# EAGLE board midicontrol_v5 (EAGLE 9.4.0)
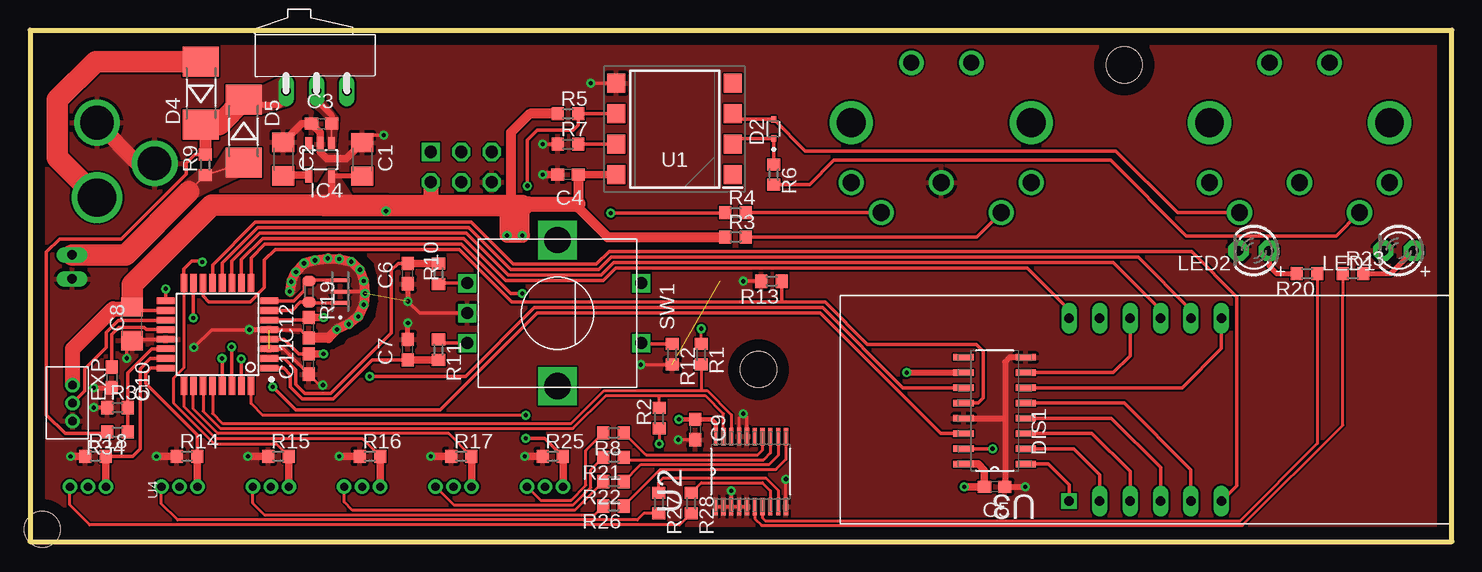
[diagram p0: board, top side]
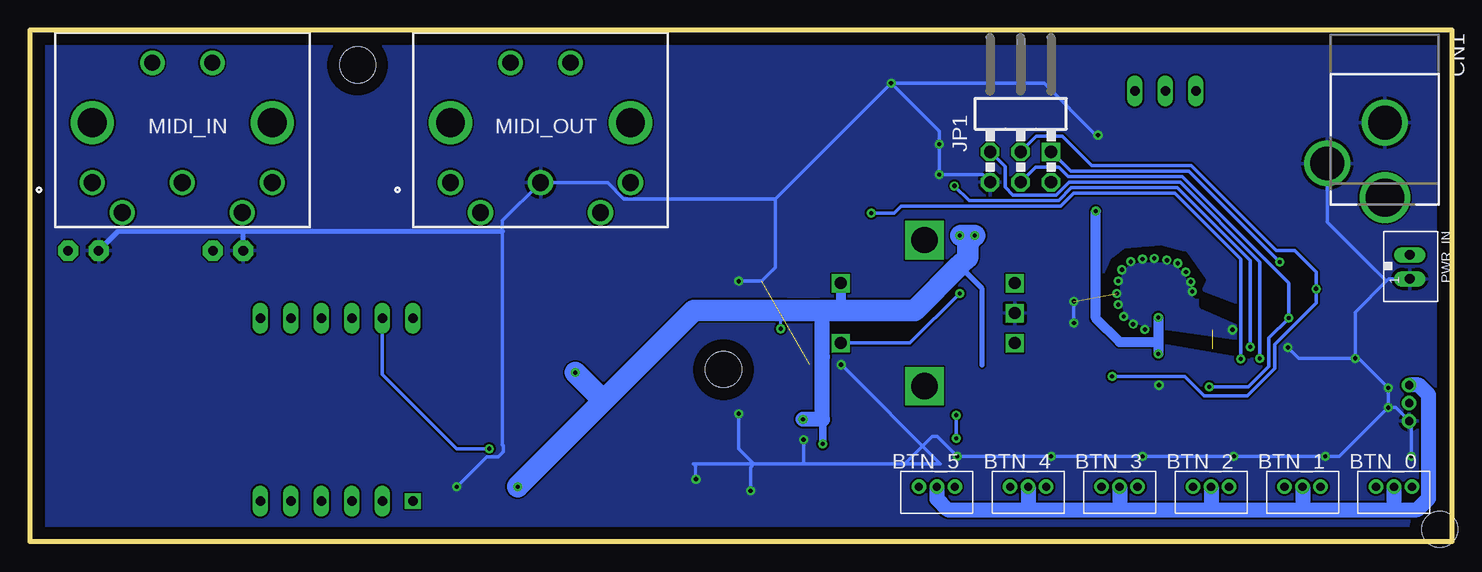
[diagram p1: board, bottom side, seen from below]

Size 118.49 x 42.67 mm. Coordinates in mm from the lower left corner, seen from the top.
Outline: 0,42.67 0,0 118.49,0 118.49,42.67 0,42.67
Copper layers (1*16): Top 0.035mm / dielectric 1.5mm / Bottom 0.035mm
Design rules "default": minimum track width 6mil, minimum drill 0.35mm, track to track 6mil, track to pad 6mil, pad to pad 6mil, via to via 6mil, smd to smd 6mil, copper to edge 40mil, drill to drill 6mil, minimum pad ring 10mil, minimum via ring 8mil, stop-mask expansion 4mil, vias tented up to drill 0mil, thermal gap 10mil
Net classes: 0 default: clearance 0.152 mm
Holes 3 mm at 91.19,39.75 60.71,14.35 1.02,1.02

## Footprints (pad centres in the part's own frame; a part is rotated, then mirrored left to right if it is on the bottom)
B3B-ZR = drill 0.7 pad 1.1: 1 -1.5,0; 2 0,0; 3 1.5,0
C1206 = smd 1.6 x 1.8: 1 -1.4,0; 2 1.4,0
C0603 = smd 1.1 x 1: 1 -0.85,0; 2 0.85,0
DCJACK_2MM_PTH = drill 2.8: GND 0,7.35; GNDBREAK 4.8,10.75 | drill 3.2: PWR 0,13.6
SODFL1608X70N = smd 0.53 x 0.4: A 0.8,0; C -0.8,0
MELF-MLL41 = smd 2.5 x 3: A 2.625,0; C -2.625,0
NFD-5641 = drill 0.8 square: P$1 -6.35,-7.62 | drill 0.8 long: P$2 -3.81,-7.62; P$3 -1.27,-7.62; P$4 1.27,-7.62; P$5 3.81,-7.62; P$6 6.35,-7.62; P$7 6.35,7.62; P$8 3.81,7.62; P$9 1.27,7.62; P$10 -1.27,7.62; P$11 -3.81,7.62; P$12 -6.35,7.62
SOT23-5 = smd 0.55 x 1.2: 1 -0.95,-1.3; 2 0,-1.3; 3 0.95,-1.3; 4 0.95,1.3; 5 -0.95,1.3
AVR-ISP-6R = drill 1.016 square: 1 -2.54,-1.27 | drill 1.016 octagon: 2 -2.54,1.27; 3 0,-1.27; 4 0,1.27; 5 2.54,-1.27; 6 2.54,1.27
LED3MM = drill 0.813 pad 1.676 octagon: A -1.27,0; K 1.27,0
MAB-5-SH = drill 1.4 pad 2.1: 1 7.5,-2.5; 2 0,-2.5; 3 -7.5,-2.5; 4 5,0; 5 -5,0 | drill 1.35 pad 2: 6 -2.5,-12.5; 7 2.5,-12.5 | drill 2.4 pad 3.6: 8 -7.5,-7.5; 9 7.5,-7.5
JST_B2B-PH_HEADER = drill 0.8 long: P1 1.075,0.048; P2 -0.925,0.048
R0603 = smd 1 x 1.1: 1 -0.85,0; 2 0.85,0
R0603-ROUND = smd 0.898 x 1.1: 1 -0.889,0; 2 0.889,0
ESP201 = drill 0.8 long: P$1 0,0; P$2 2.54,0; P$3 -2.54,0
ALPS_EC12E_SW = drill 1 square: A -2.5,-7.5; B 2.5,-7.5; C 0,-7.5; D -2.5,7; E 2.5,7 | drill 2.2 square: GND1 -6.1,0; GND2 6.1,0
SOP254P1030X460-8N = smd 1.5 x 1.6: 1 -4.85,3.81; 2 -4.85,1.27; 3 -4.85,-1.27; 4 -4.85,-3.81; 5 4.85,-3.81; 6 4.85,-1.27; 7 4.85,1.27; 8 4.85,3.81
SOP65P640X110-20N = smd 1.473 x 0.356: 1 -2.921,2.921; 2 -2.921,2.286; 3 -2.921,1.626; 4 -2.921,0.965; 5 -2.921,0.33; 6 -2.921,-0.33; 7 -2.921,-0.965; 8 -2.921,-1.626; 9 -2.921,-2.286; 10 -2.921,-2.921; 11 2.921,-2.921; 12 2.921,-2.286; 13 2.921,-1.626; 14 2.921,-0.965; 15 2.921,-0.33; 16 2.921,0.33; 17 2.921,0.965; 18 2.921,1.626; 19 2.921,2.286; 20 2.921,2.921
SOIC127P600X175-16N = smd 1.702 x 0.533: 1 -2.591,4.445; 2 -2.591,3.175; 3 -2.591,1.905; 4 -2.591,0.635; 5 -2.591,-0.635; 6 -2.591,-1.905; 7 -2.591,-3.175; 8 -2.591,-4.445; 9 2.591,-4.445; 10 2.591,-3.175; 11 2.591,-1.905; 12 2.591,-0.635; 13 2.591,0.635; 14 2.591,1.905; 15 2.591,3.175; 16 2.591,4.445
QFP80P900X900X120-32N = smd 1.5 x 0.55: 1 -4.3,2.8; 2 -4.3,2; 3 -4.3,1.2; 4 -4.3,0.4; 5 -4.3,-0.4; 6 -4.3,-1.2; 7 -4.3,-2; 8 -4.3,-2.8; 17 4.3,-2.8; 18 4.3,-2; 19 4.3,-1.2; 20 4.3,-0.4; 21 4.3,0.4; 22 4.3,1.2; 23 4.3,2; 24 4.3,2.8 | smd 0.55 x 1.5: 9 -2.8,-4.3; 10 -2,-4.3; 11 -1.2,-4.3; 12 -0.4,-4.3; 13 0.4,-4.3; 14 1.2,-4.3; 15 2,-4.3; 16 2.8,-4.3; 25 2.8,4.3; 26 2,4.3; 27 1.2,4.3; 28 0.4,4.3; 29 -0.4,4.3; 30 -1.2,4.3; 31 -2,4.3; 32 -2.8,4.3
OSC_CSTCE16M0V53-R0 = smd 0.3 x 1.6: 1 -0.95,0; 2 0,0; 3 0.95,0

## Placement (x,y rotation side)
BTN_0  B3B-ZR  [B3B-ZR]  4.83,4.57 0 bottom
BTN_1  B3B-ZR  [B3B-ZR]  12.45,4.57 0 bottom
BTN_2  B3B-ZR  [B3B-ZR]  20.07,4.57 0 bottom
BTN_3  B3B-ZR  [B3B-ZR]  27.69,4.57 0 bottom
BTN_4  B3B-ZR  [B3B-ZR]  35.31,4.57 0 bottom
BTN_5  B3B-ZR  [B3B-ZR]  42.93,4.57 0 bottom
C1  4.7uf  [C1206]  27.69,31.88 270 top
C2  4.7uf  [C1206]  21.11,31.9 270 top
C3  0.1uf  [C0603]  24.31,34.85 0 top
C4  0.1uf  [C0603]  44.83,30.61 180 top
C5  4.7uf  [C0603]  80.39,4.57 180 top
C6  100nf  [C0603]  31.5,22.35 90 top
C7  100nf  [C0603]  31.5,16 90 top
C8  100nf  [C1206]  8.51,18.16 90 top
C9  0.1uf  [C0603]  55.42,9.35 270 top
C10  100nf  [C0603]  6.81,13.69 270 top
C11  100nf  [C0603]  23.24,14.81 90 top
C12  100nf  [C0603]  23.24,17.83 90 top
CN1  [DCJACK_2MM_PTH]  5.59,42.29 180 bottom
D2  1N914BWT  [SODFL1608X70N]  61.98,34.42 90 top
D4  1N4004/SM4004  [MELF-MLL41]  14.25,37.41 90 top
D5  1N4004/SM4004  [MELF-MLL41]  17.81,34.21 270 top
DIS1  NFD-5641BS  [NFD-5641]  92.94,11 0 top
EXP  B3B-ZR  [B3B-ZR]  3.56,11.56 270 top
IC4  [SOT23-5]  24.18,31.85 180 top
JP1  AVR-ISP-6HORZ  [AVR-ISP-6R]  35.94,31.24 180 bottom
LED1  [LED3MM]  114.05,24.26 180 top
LED2  [LED3MM]  101.98,24.26 180 top
MIDI_IN  MABP 5S  [MAB-5-SH]  105.79,27.43 180 bottom
MIDI_OUT  MAB_5_SH  [MAB-5-SH]  75.95,27.43 180 bottom
PWR_IN  JST-PH_2-PIN_HEADER  [JST_B2B-PH_HEADER]  3.56,22.99 270 bottom
R1  10k  [R0603]  55.93,15.62 270 top
R2  10k  [R0603]  52.43,10.29 90 top
R3  220R  [R0603]  58.8,25.4 0 top
R4  220R  [R0603]  58.8,27.43 0 top
R5  220  [R0603]  44.83,35.69 0 top
R6  220  [R0603]  61.98,30.61 270 top
R7  4.7k  [R0603]  44.83,33.15 0 top
R8  220R  [R0603]  48.64,9.07 180 top
R9  1k  [R0603]  14.61,31.42 90 top
R10  10k  [R0603]  34.04,22.35 90 top
R11  10k  [R0603]  34.04,16 270 top
R12  10k  [R0603]  53.52,15.62 270 top
R13  10k  [R0603]  61.8,21.72 180 top
R14  10k  [R0603]  13.08,7.11 0 top
R15  10k  [R0603]  20.7,7.11 0 top
R16  10k  [R0603]  28.32,7.11 0 top
R17  10k  [R0603]  35.94,7.11 0 top
R18  10k  [R0603]  5.46,7.11 0 top
R19  1M  [R0603-ROUND]  23.24,20.85 270 top
R20  220R  [R0603]  106.43,22.35 180 top
R21  220R  [R0603]  48.64,7.04 180 top
R22  220R  [R0603]  48.64,5 180 top
R23  220R  [R0603]  110.24,22.35 0 top
R25  10k  [R0603]  43.56,7.11 0 top
R26  220R  [R0603]  48.64,2.97 180 top
R27  220R  [R0603]  52.4,3.2 270 top
R28  220R  [R0603]  55.09,3.2 270 top
R34  100k  [R0603]  7.29,9.14 180 top
R35  69k  [R0603]  7.29,11.18 0 top
S1  ESP201  [ESP201]  23.88,37.59 0 top
SW1  EC12E_SW  [ALPS_EC12E_SW]  43.94,19.05 270 top
U1  6N138S(TB)  [SOP254P1030X460-8N]  53.72,34.42 180 top
U2  PCA9634PW,112  [SOP65P640X110-20N]  60.07,5.84 90 top
U3  74HC595D  [SOIC127P600X175-16N]  80.39,10.92 180 top
U4  ATMEGA328P-AN  [QFP80P900X900X120-32N]  15.62,17.27 180 top
Y1  CSTCE16M0V53-R0  [OSC_CSTCE16M0V53-R0]  25.86,20.85 90 top

## Library data of the parts
BTN_0 BTN_1-BTN_5 EXP = jst
C1-C12 = rcl; SPICEPREFIX: C
CN1 LED1 LED2 = adafruit
D2 = 1N914BWT; AVAILABILITY: Unavailable; DESCRIPTION: 1N914B Series 75 V 300 mA Surface Mount Small Signal Diode - SOD-523F; MF: ON Semiconductor; MP: 1N914BWT; PACKAGE: SOD-523F ON Semiconductor; PRICE: None
D4 D5 = _mod_diode
DIS1 = display-misc
IC4 = v-reg-micrel; OC_FARNELL: unknown; OC_NEWARK: unknown
JP1 = avr-7
MIDI_IN MIDI_OUT = MAB_5_SH; DESCRIPTION: HIRSCHMANN - MAB 5 SH - SOCKET, DIN, PCB, 5PIN; HEIGHT: mm; MANUFACTURER_NAME: Hirschmann; MANUFACTURER_PART_NUMBER: MAB 5 SH
PWR_IN = srg
R1-R18 R20-R23 R25-R28 R34 R35 = rcl; SPICEPREFIX: R
R19 = SmartPrj
S1 = olli
SW1 = switch-alps; MPN: EC12E2424407; OC_FARNELL: 1520813; OC_NEWARK: 74M1068
U1 = 6N138S(TB); DESCRIPTION: High Speed Optocouplers Low Input, High Gain DC Input; HEIGHT: 4.6mm; MANUFACTURER_NAME: Everlight; MANUFACTURER_PART_NUMBER: 6N138S(TB); MOUSER_PART_NUMBER: 638-6N138STB; MOUSER_PRICE-STOCK: https://www.mouser.com/Search/Refine.aspx?Keyword=638-6N138STB
U2 = PCA9634PW_112; AVAILABILITY: Unavailable; DESCRIPTION: LED DRVR 16Segment 2.5V/3.3V/5V 20-Pin TSSOP Tube; MF: NXP USA; MP: PCA9634PW,112; PACKAGE: TSSOP-20 NXP Semiconductors; PRICE: None
U3 = 74HC595D; AVAILABILITY: Unavailable; DESCRIPTION: Shift Register Single 8-Bit Serial to Serial/Parallel 16-Pin SO; MF: Toshiba Semiconductor; MP: 74HC595D; PACKAGE: SO-16 NXP Semiconductors; PRICE: None
U4 = ATMEGA328P-AN; AVAILABILITY: Unavailable; DESCRIPTION: MCU 8-bit ATmega AVR RISC 32KB Flash 2.5V/3.3V/5V 32-Pin TQFP Tray; MF: Microchip; MP: ATMEGA328P-AN; PACKAGE: TQFP-32 Microchip; PRICE: None
Y1 = CSTCE16M0V53-R0; AVAILABILITY: Unavailable; DESCRIPTION: Ceramic Resonator 16MHz ??0.5% _Tol_ ??0.3% _Stability_ 15pF 40Ohm 3-Pin CSMD T/R; MF: Murata; MP: CSTCE16M0V53-R0; PACKAGE: SMD-3 Murata; PRICE: None

## Nets
+5V: BTN_0.2 BTN_1.2 BTN_2.2 BTN_3.2 BTN_4.2 BTN_5.2 C1.2 C4.1 C5.2 C8.2 C9.1 C11.2 C12.2 EXP.1 IC4.5 JP1.2 R1.1 R2.1 R3.1 R5.1 SW1.D U1.8 U2.20 U3.10 U3.16 U4.4 U4.6 U4.18
B1: BTN_0.1 R18.2 U4.23
B2: BTN_1.1 R14.2 U4.24
B3: BTN_3.1 R16.2 U4.25
B4: BTN_4.1 R17.2 U4.26
B5: BTN_5.1 R25.2 U4.32
BAT_LVL: R34.1 R35.2 U4.22
D1: DIS1.P$6 U4.13
D2: DIS1.P$8 U4.12
D3: DIS1.P$9 U4.11
D4: DIS1.P$12 U4.10
ENC_A: R10.1 SW1.A
ENC_B: R11.1 SW1.B
ENC_SW: R12.1 SW1.E U4.9
EXP_IN: EXP.2 U4.19
GND: C1.1 C2.1 C3.1 C4.2 C5.1 C6.1 C7.2 C8.1 C9.2 C10.2 C11.1 C12.1 CN1.GND CN1.GNDBREAK EXP.3 IC4.2 JP1.6 LED1.K LED2.K MIDI_OUT.2 PWR_IN.P1 R7.1 R12.2 R13.2 R14.1 R15.1 R16.1 R17.1 R18.1 R25.1 R35.1 SW1.C U1.5 U2.1 U2.2 U2.3 U2.4 U2.5 U2.10 U2.16 U2.17 U3.8 U3.13 U4.3 U4.5 U4.21 Y1.2
LED_GND_0: BTN_2.3 R26.2
LED_GND_1: BTN_1.3 R27.2
LED_GND_2: BTN_0.3 R28.2
LED_GND_4: BTN_5.3 R8.2
LED_GND_5: BTN_4.3 R21.2
LED_GND_6: BTN_3.3 R22.2
MIDI_IN: R5.2 U1.6 U4.30
MIDI_OUT: R4.1 U4.31
MISO: BTN_2.1 JP1.1 R15.2 U4.16
MOSI: JP1.4 U3.14 U4.15
N$1: DIS1.P$11 U3.15
N$2: DIS1.P$7 U3.6
N$3: DIS1.P$4 U3.4
N$4: DIS1.P$2 U3.2
N$5: DIS1.P$1 U3.1
N$6: DIS1.P$10 U3.7
N$7: DIS1.P$5 U3.5
N$8: DIS1.P$3 U3.3
N$9: MIDI_OUT.4 R3.2
N$10: MIDI_OUT.5 R4.2
N$11: D2.A MIDI_IN.5 U1.3
N$12: D2.C R6.1 U1.2
N$13: MIDI_IN.4 R6.2
N$14: R7.2 U1.7
N$15: C6.2 R10.2 U4.2
N$16: R19.1 U4.8 Y1.3
N$17: C7.1 R11.2 U4.1
N$18: D5.A PWR_IN.P2 R9.1
N$19: R19.2 U4.7 Y1.1
N$20: C2.2 IC4.4
N$21: C10.1 U4.20
N$22: LED2.A R20.2
N$23: R8.1 U2.14
N$24: R21.1 U2.13
N$25: CN1.PWR D4.A
N$26: C3.2 IC4.1 S1.P$1
N$27: R22.1 U2.12
N$28: R26.1 U2.11
N$29: R27.1 U2.9
N$30: R28.1 U2.8
N$31: R20.1 U2.7
N$32: R23.1 U2.6
N$33: LED1.A R23.2
PWR: D4.C D5.C R9.2 R34.2 S1.P$3
RCK: R13.1 U3.12 U4.14
RST: JP1.5 U4.29
SCK: JP1.3 U3.11 U4.17
SCL: R1.2 U2.18 U4.28
SDA: R2.2 U2.19 U4.27

## Tracks (layer width: path | path; a pad name or v marks a point on that pad's centre or on a via)
+5V  (via drill 0.35)
  Top 0.254: R2.1 v52.43,8.14 | R1.1 v55.93,17.75
  Top 0.305: 19.98,18.53 U4.6 23.03,18.47 C12.2 | C11.2 22.4,15.66 21.19,16.87 U4.4 | C8.2 8.77,19.27 U4.18 | 24.84,28.04 24.51,28.04 | 57.15,9.86 57.12,9.88
  Top 0.356: U2.20 57.15,9.86 | 57.12,9.88 56.81,10.2 C9.1 v54.08,10.2
  Top 0.406: C1.2 25.2,30.48 IC4.5
  Top 0.508: C8.2 8.51,21.42 | v73.05,14.1 U3.10
  Top 0.61: 48.66,30.82 U1.8 C4.1 | R3.1 | U3.16 79.02,6.48 79.54,5.95 C5.2 v77.85,4.57 | C12.2 v24.46,18.68 | C11.2 v24.46,15.66 | IC4.5 25.13,28.06 25.15,28.04
  Top 0.813: 40.08,27.64 40.08,28.04 40.08,34.11 41.66,35.69 R5.1 | R3.1 48.13,25.4 45.68,27.85 45.68,28.16 C4.1 | v29.67,27.56 29.67,27.99 29.72,28.04
  Top 1.27: C8.2 8.37,19.42 6.9,19.42 3.56,16.08 EXP.1 | 45.68,28.16 41.54,28.16 41.02,27.64 | 40.08,27.64 39.75,27.3 v39.75,25.53 v41.02,25.53 41.02,27.64 | 41.02,27.64 41.02,28.04 | JP1.2 33.4,28.04
  Top 1.778: 41.02,28.04 40.08,28.04 33.4,28.04 29.72,28.04 25.15,28.04 24.51,28.04 | 8.51,19.65 8.51,21.42 15.14,28.06 25.13,28.06
  Bottom 0.254: v55.93,17.75 55.93,18.97 55.63,19.28
  Bottom 0.406: 41.04,23.01 39.14,21.11 39.14,14.73
  Bottom 0.61: v52.43,8.14 v52.42,8.14 52.42,10.19 52.45,10.19
  Bottom 0.813: v24.46,18.68 24.46,16.64 | 24.46,16.64 v24.46,15.66 | 24.46,16.64 27.69,16.64 29.67,18.62 v29.67,27.56 | SW1.D 50.94,19.67 50.55,19.28 | v54.08,10.2 54.07,10.19 52.45,10.19
  Bottom 1.016: 52.45,19.28 52.45,10.19
  Bottom 1.27: BTN_0.2 4.83,2.67 | BTN_5.2 42.93,3.56 42.04,2.67 35.31,2.67 | 35.31,2.67 27.69,2.67 | 27.69,2.67 20.07,2.67 | 20.07,2.67 12.45,2.67 | 12.45,2.67 4.83,2.67 | BTN_4.2 35.31,2.67 | BTN_3.2 27.69,2.67 | BTN_2.2 20.07,2.67 | BTN_1.2 12.45,2.67 | 4.83,2.67 2.87,2.67 1.94,3.6 1.94,12.24 2.75,13.06 EXP.1 | 52.45,10.19 52.45,15.44 52.48,15.47 52.48,19.24 52.45,19.28 | 52.45,10.19 52.46,10.2 v54.08,10.2
  Bottom 1.778: 40.91,25.53 v39.75,25.53 40.36,24.92 40.36,23.69 41.04,23.01 44.77,19.28 50.55,19.28 52.45,19.28 55.63,19.28 63.17,19.28 70.88,11.57 | v77.85,4.57 77.85,4.6 70.88,11.57 | v73.05,14.1 70.88,11.92 70.88,11.57
  pour Top (no thermals): 24.89,31.11 23.24,28.45 27.05,28.58 25.4,31.11
B1
  Top 0.305: U4.23 10.03,15.27 9.18,14.42 9.18,7.73 8.55,7.11 R18.2
  Top 0.61: R18.2 6.33,7.1 BTN_0.1
B2
  Top 0.305: U4.24 10.08,14.47 9.64,14.03 9.64,13.2 13.92,8.91 13.92,7.12 R14.2
  Top 0.61: R14.2 13.95,7.1 BTN_1.1
B3
  Top 0.254: U4.25 12.81,11.28 15.54,8.56 27.72,8.56 R16.2
  Top 0.61: R16.2 29.19,7.1 BTN_3.1
B4
  Top 0.254: R17.2 34.89,9.02 15.65,9.02 13.62,11.05 U4.26
  Top 0.61: R17.2 36.81,7.1 BTN_4.1
B5  (via drill 0.35)
  Top 0.254: U4.32 18.42,11.53 19.41,10.54 v41.3,10.54
  Top 0.305: R25.2 42.91,8.61 v41.3,8.61
  Top 0.61: R25.2 44.43,7.1 BTN_5.1
  Bottom 0.254: v41.3,10.54
  Bottom 0.305: v41.3,10.54 v41.3,8.61
BAT_LVL
  Top 0.305: U4.22 10.15,16.07 8.14,14.06 R35.2 R34.1
D1
  Top 0.305: U4.13 15.21,21.58 15.21,23.07 18.78,26.64 36.78,26.64 40.28,23.14 47.2,23.14 48.25,24.19 96.8,24.19 100.56,20.42 100.56,4.65 DIS1.P$6
D2
  Top 0.305: U4.12 16.02,23.23 18.97,26.19 36.56,26.19 40.07,22.68 47.39,22.68 48.44,23.73 92.35,23.73 96.75,19.33 DIS1.P$8
D3
  Top 0.305: U4.11 16.82,23.39 19.16,25.73 36.35,25.73 39.85,22.22 47.58,22.22 48.63,23.27 90.27,23.27 94.21,19.33 DIS1.P$9
D4
  Top 0.305: U4.10 17.62,23.52 19.38,25.27 36.14,25.27 39.65,21.77 47.77,21.77 48.81,22.81 83.11,22.81 86.59,19.33 DIS1.P$12
ENC_A
  Top 0.305: 34.21,21.68 R10.1 34.08,21.55 SW1.A
ENC_B
  Top 0.305: SW1.B 34.34,16.55 R11.1
ENC_SW  (via drill 0.35)
  Top 0.305: U4.9 18.42,23.67 19.57,24.82 35.94,24.82 40.06,20.7 v41.02,20.7 | SW1.E 51.02,16.47 R12.1
  Bottom 0.305: SW1.E 45.17,16.55 v41.02,20.7
EXP_IN
  Top 0.305: U4.19 11.3,18.46 7.36,18.46 6.35,17.45 6.35,16.18 4.57,14.4 4.57,12.57 EXP.2
GND  (via drill 0.35)  (3 unrouted)
  Top 0.254: U4.5 | C11.1 24.16,13.04 v24.41,13.04 | U2.17 59.11,10.34 v59.44,10.67 | v50.9,14.76 v50.91,14.77 R12.2 | U2.10 v62.99,5.21 | C9.2 v54.03,8.5
  Top 0.305: U4.3 21.14,16.07 C11.1 | U4.21 8.95,16.87 C8.1 8.05,16.3 v8.05,15.29 | R7.1 v42.72,33.15 | U1.5 v46.74,38.23 | C12.1 22.55,17.67 U4.5 | R35.1 v5.31,11.18 | C1.1 28.32,33.91 v29.49,33.91 | v18.28,17.67 15.13,17.67 v13.66,16.2 | R13.2 v59.44,21.72 | v27.91,20.7 27.76,20.85 Y1.2 | SW1.C 32.49,19.05 v31.5,20.04 | v59.44,10.67 59.74,10.36 U2.16 | U2.5 U2.4 U2.3 | U2.3 U2.2 U2.1 | U2.3 v58.45,4.24
  Top 0.406: C10.2 6.79,12.83 v5.31,12.83 | C6.1 v31.5,20.04 | C7.2 v31.5,18.24 | U4.5 v18.28,17.67
  Top 0.508: U3.8 81.66,15.37 81.26,14.96 81.26,10.29 | 81.26,10.29 81.26,4.59 C5.1 v82.93,4.57 | U3.13 81.26,10.29
  Top 0.61: R14.1 v10.54,7.11 | R15.1 v18.16,7.11 | R16.1 v25.78,7.11 | R17.1 v33.4,7.11 | R18.1 v3.38,7.11 | R25.1 v41.22,7.11 | C4.2 v42.72,30.61 | C2.1 22.65,34.85 C3.1 24.18,34.13 IC4.2 24.18,32.48 24.72,31.94 26.35,31.94 C1.1
  Top 0.813: v21.65,20.85 21.77,21.59 v21.77,21.67 v22.16,22.49 v22.84,23.22 v23.75,23.47 v24.82,23.62 v25.78,23.57 v26.77,23.34 v27.5,22.67 v27.81,21.74 v27.91,20.7 v27.81,19.76 v27.36,18.77 v26.57,18.14 v25.58,17.7 24.85,16.98 C12.1
  Top 1.27: CN1.GND 8.99,31.54 CN1.GNDBREAK
  Bottom 0.254: v62.99,5.21 62.99,6.24 63.23,6.48
  Bottom 0.305: JP1.6 39.12,30.61 v42.72,30.61 v42.72,33.15 42.72,34.21 v46.74,38.23 | v46.74,38.23 33.98,38.23 29.67,33.91 v29.49,33.91 29.44,33.86 | 10.85,32.01 CN1.GNDBREAK 10.39,26.64 5.46,21.72 | PWR_IN.P1 5.27,21.91 5.46,21.72 | 5.46,21.72 8.05,19.13 8.05,15.37 | 8.05,15.37 v8.05,15.29 12.75,15.29 v13.66,16.2 | v5.31,11.18 v5.31,12.83 7.85,15.37 8.05,15.37 | v3.38,7.11 3.38,9.88 EXP.3 4.67,11.18 v5.31,11.18 | v5.31,11.18 9.37,7.11 v10.54,7.11 v18.16,7.11 v25.78,7.11 v33.4,7.11 v41.22,7.11 42.88,8.77 43.31,8.77 45.6,6.48 | 45.6,6.48 42.62,6.48 v50.9,14.76 | 45.6,6.48 54.03,6.48 | 54.03,6.48 58.17,6.48 | 58.17,6.48 63.23,6.48 | v82.93,4.57 80.44,7.06 79.47,7.06 79.07,7.46 79.07,8.03 79.12,8.08 79.12,25.88 79.12,26.76 MIDI_OUT.2 70.36,29.93 69.01,28.58 56.39,28.58 | 56.39,28.58 v46.74,38.23 | v31.5,18.24 v31.5,20.04 | 56.39,28.58 56.39,22.86 57.53,21.72 v59.44,21.72 | v54.03,8.5 54.03,6.48 | v58.45,4.24 58.45,6.2 58.17,6.48 | v59.44,10.67 59.44,7.75 58.17,6.48
  Bottom 0.406: LED1.K 111.15,25.88 100.71,25.88 | 100.71,25.88 79.12,25.88 | LED2.K 100.71,25.88
  pour Bottom (rank 3): -6.6,46.48 -6.6,-10.67 139.45,-10.67 139.45,47.75 -5.33,47.75
  cutout Top: 21.34,20.45 21.46,21.21 22.35,22.61 23.24,23.37 25.02,23.62 27.05,23.11 27.81,21.97 27.81,20.32 27.56,19.18 26.8,18.29 25.53,17.65 24.26,16.89 22.73,17.02 20.07,17.4 20.07,16.76 23.62,16.26 24.26,16.13 25.27,16.26 26.03,16.64 26.42,17.14 27.3,17.53 28.07,18.03 28.58,18.8 28.83,20.07 28.83,21.34 28.7,22.22 28.45,23.11 27.81,23.75 26.8,24.38 25.4,24.51 23.62,24.51 22.48,24.13 21.84,23.5 21.34,22.99 21.08,22.48 20.7,21.34 20.57,20.32 21.34,20.32
  pour Top (rank 3): -2.79,45.85 -2.79,-4.32 126.11,-4.32 126.11,45.85
  cutout Bottom: 21.34,20.45 22.1,22.48 23.11,23.24 24.26,23.5 26.03,23.5 27.18,23.11 27.81,22.1 27.94,20.57 27.81,19.81 27.43,18.67 26.54,18.03 25.15,17.65 17.49,16.56 17.53,16.57 17.53,18.16 20.83,19.6 20.83,20.7 16.89,19.21 16.89,15.45 25.27,16.89 26.42,17.02 27.56,17.53 28.58,19.05 28.83,20.45 28.83,21.97 28.19,23.5 27.18,24.26 25.78,24.38 24.26,24.51 22.23,24 20.7,21.84
LED_GND_0
  Top 0.254: BTN_2.3 18.57,3.2 19.56,2.21 47.03,2.21 R26.2
LED_GND_1
  Top 0.254: BTN_1.3 10.95,3.15 12.29,1.8 50.61,1.8 51.16,2.35 R27.2
LED_GND_2
  Top 0.254: BTN_0.3 3.33,3.05 4.98,1.4 54.14,1.4 R28.2
LED_GND_4
  Top 0.254: R8.2 46.33,7.61 46.33,4.69 45.09,3.45 42.54,3.45 BTN_5.3
LED_GND_5
  Top 0.254: BTN_4.3 35.35,3.03 45.24,3.03 46.74,4.52 46.74,5.98 R21.2
LED_GND_6
  Top 0.254: BTN_3.3 26.19,3.3 26.87,2.62 45.41,2.62 R22.2
MIDI_IN  (via drill 0.35)
  Top 0.305: U1.6 R5.2 45.68,34.72 45.27,34.31 42.27,34.31 41.45,33.5 v41.45,29.67 | v16.8,16.23 16.8,13 U4.30
  Bottom 0.305: v16.8,16.23 16.8,23.43 22.88,29.52 31.7,29.52 32.77,28.45 40.23,28.45 v41.45,29.67
MIDI_OUT  (via drill 0.35)
  Top 0.305: U4.31 17.6,12.99 v17.6,15.24 | R4.1 57.93,27.41 v48.39,27.41
  Bottom 0.305: v17.6,15.24 17.6,23.57 23.09,29.06 31.51,29.06 32.58,27.99 45.9,27.99 46.48,27.41 v48.39,27.41
MISO  (via drill 0.35)
  Top 0.254: R15.2 20.51,8.15 15.37,8.15 11.94,11.58 11.94,13.61 12.82,14.5 U4.16
  Top 0.305: v14.35,23.32 14.25,23.42 13.49,23.42 12.82,22.75 U4.16
  Top 0.61: R15.2 21.57,7.1 BTN_2.1
  Bottom 0.305: JP1.1 31.77,30.89 21.92,30.89 v14.35,23.32
MOSI  (via drill 0.35)
  Top 0.305: U4.15 13.6,21.55 v13.6,18.64 | U3.14 75.9,9.02 65.86,19.05 42.25,19.05 34.17,10.97 22.15,10.97 v20.22,12.9
  Bottom 0.305: 35.38,30.53 JP1.4 34.67,31.24 32.78,31.24 31.97,30.43 22.45,30.43 13.6,21.57 v13.6,18.64 13.6,18.62 15.25,16.97 15.25,14.62 16.97,12.9 v20.22,12.9
N$1  (via drill 0.35)
  Top 0.305: U3.15 v80.21,7.75
  Bottom 0.305: v80.21,7.75 82.93,7.75 89.13,13.94 DIS1.P$11
N$2
  Top 0.305: DIS1.P$7 99.29,16.1 96.01,12.83 U3.6
N$3
  Top 0.305: U3.4 90.12,10.29 94.21,6.2 DIS1.P$4
N$4
  Top 0.305: U3.2 86.97,7.75 89.13,5.59 DIS1.P$2
N$5
  Top 0.305: U3.1 84.84,6.48 86.59,4.72 DIS1.P$1
N$6
  Top 0.305: DIS1.P$10 91.67,15.49 90.27,14.1 U3.7
N$7
  Top 0.305: U3.5 91.19,11.56 96.75,5.99 DIS1.P$5
N$8
  Top 0.305: U3.3 88.49,9.02 91.67,5.84 DIS1.P$3
N$9
  Top 0.305: MIDI_OUT.4 78.91,25.4 R3.2
N$10
  Top 0.305: MIDI_OUT.5 R4.2
N$11
  Top 0.305: U1.3 59.04,35.22 D2.A 64.61,32.59 90.48,32.59 95.63,27.43 MIDI_IN.5
N$12
  Top 0.305: U1.2 59.04,33.62 D2.C R6.1
N$13
  Top 0.305: R6.2 62.01,29.79 64.97,29.79 66.98,31.8 90.07,31.8 96.37,25.5 108.86,25.5 MIDI_IN.4
N$14
  Top 0.305: R7.2 U1.7
N$15
  Top 0.305: C6.2 30.67,23.2 30.12,22.66 30.12,17.41 25.06,12.34 22.91,12.34 22.15,13.11 22.15,14.33 21.2,15.27 U4.2
  Top 0.61: R10.2 32.86,23.2 32.79,23.18 32.77,23.2 C6.2
N$16
  Top 0.305: Y1.3 23.3,21.8 R19.1 22.86,21.74 22.86,20.95 21.98,20.07 U4.8
N$17
  Top 0.305: U4.1 21.14,14.47 21.69,13.92 21.69,12.9 22.71,11.89 25.27,11.89 28.54,15.15 C7.1
  Top 0.61: R11.2 C7.1
N$18
  Top 0.152: 13.23,29.19 R9.1 D5.A
  Top 1.778: PWR_IN.P2 7.96,23.91 13.23,29.19
  pour Top (no thermals): 12.7,29.84 14.1,30.99 15.24,30.99 16.38,32.77 17.38,30.4 15.11,29.34 13.84,28.7
N$19
  Top 0.305: Y1.1 23.3,19.9 R19.2 22.53,19.96 21.84,19.27 U4.7
N$20
  Top 0.61: IC4.4 21.16,30.55 C2.2
  Top 0.813: 21.26,30.35 C2.2
N$21
  Top 0.305: U4.20 11.3,17.7 9.7,17.7 9.54,17.87 7.42,17.87 6.81,17.26 C10.1
N$22
  Top 0.406: R20.2 103.89,22.35 103.25,22.99 LED2.A
N$23
  Top 0.254: R8.1 51.32,7.24 60.66,7.24 61.04,7.62 U2.14
N$24
  Top 0.254: R21.1 49.69,6.83 61.14,6.83 61.7,7.39 U2.13
N$25
  Top 1.778: CN1.PWR 2.27,32.01 2.27,33.14 2.28,36.84 5.47,40.04 D4.A
N$26
  Top 0.152: IC4.1 25.13,34.83
  Top 0.508: S1.P$1 23.88,36.8 25.13,35.55 25.13,34.83
  Top 0.813: C3.2 25.13,34.83
  pour Top (no thermals): 24.64,35.31 23.37,36.58 24.26,37.08 25.65,35.31 25.4,32.64 24.89,32.64 24.77,34.42
N$27
  Top 0.254: R22.1 50.91,6.43 61.59,6.43 62.36,7.2 U2.12
N$28
  Top 0.254: R26.1 52.54,6.02 62.15,6.02 62.99,6.86 U2.11
N$29
  Top 0.254: R27.1 52.4,4.94 52.77,5.31 61.32,5.31 62.36,4.27 U2.9
N$30
  Top 0.254: U2.8 61.7,4.24 61.04,4.9 55.94,4.9 R28.1
N$31
  Top 0.254: U2.7 61.04,1.98 61.27,1.75 100.86,1.75 107.29,8.18 107.29,22.34 R20.1
N$32
  Top 0.254: U2.6 60.4,1.91 60.96,1.35 101.03,1.35 109.4,9.71 109.4,20.45 109.4,20.5 109.4,22.34 R23.1
N$33
  Top 0.406: LED1.A 113.41,22.35 R23.2
PWR
  Top 0.305: R34.2 6.31,9.02 2.92,9.02 1.37,10.57 1.37,24.16 2.46,25.25 7.61,25.25 13.02,30.66 13.02,31.58 13.72,32.27 R9.2
  Top 0.508: S1.P$3 21.34,36.96 20.76,36.38 18.26,36.38 D5.C
  Top 1.016: D4.C 14.61,34.43 R9.2
  Top 1.778: D4.C 15.76,34.79 D5.C
  pour Top (no thermals): 19.3,37.97 20.95,38.73 21.34,36.32 19.3,35.69 18.8,37.08
RCK
  Top 0.305: U4.14 14.42,20.48 14.91,19.99 18.35,19.99 19.53,21.18 19.53,23.47 20.42,24.36 35.75,24.36 40.15,19.96 62.61,19.96 | 62.61,19.96 66.27,19.96 69.77,16.46 78.84,16.46 79.45,15.85 79.45,11.99 79.02,11.56 U3.12 | R13.1 62.65,20 62.61,19.96
RST  (via drill 0.35)
  Top 0.305: v16,15.27 16.02,15.25 U4.29
  Bottom 0.305: JP1.5 37.24,31.27 37.24,29.57 36.58,28.91 32.96,28.91 31.89,29.97 22.66,29.97 16,23.32 v16,15.27
SCK  (via drill 0.35)
  Top 0.305: U4.17 v11.32,21.08 | v28.32,13.77 36.3,13.77 42.04,19.51 66.07,19.51 72.75,12.83 U3.11
  Bottom 0.305: v28.32,13.77 22.25,13.77 20.65,12.17 17.04,12.17 14.78,14.44 14.78,16.43 11.32,19.89 v11.32,21.08 11.32,22.5 13.08,24.26 14.64,24.26 21.73,31.34 30.02,31.34 32.49,33.81 34.65,33.81 JP1.3
SCL
  Top 0.254: U4.28 15.22,10.69 16.08,9.83 45.07,9.83 47.84,12.6 55.93,12.6 | U2.18 58.45,10.58 56.43,12.6 55.93,12.6 | R1.2 55.93,12.6
SDA
  Top 0.254: U4.27 14.42,10.88 15.87,9.42 45.24,9.42 48.01,12.19 52.45,12.19 | U2.19 57.78,10.67 56.26,12.19 52.45,12.19 | 52.45,12.19 52.43,12.17 R2.2